# Altium PCB DOAN2.PcbDoc
Units mil, origin at the board's own origin, x right, y up, seen from the top; angles counter-clockwise.
Board outline 4270 x 4265 mil, 2 copper layers (Top Layer, Bottom Layer); 73 components, 65 nets, 251 pads, 0 vias.
Unrouted connection lines stored in the file: 12.
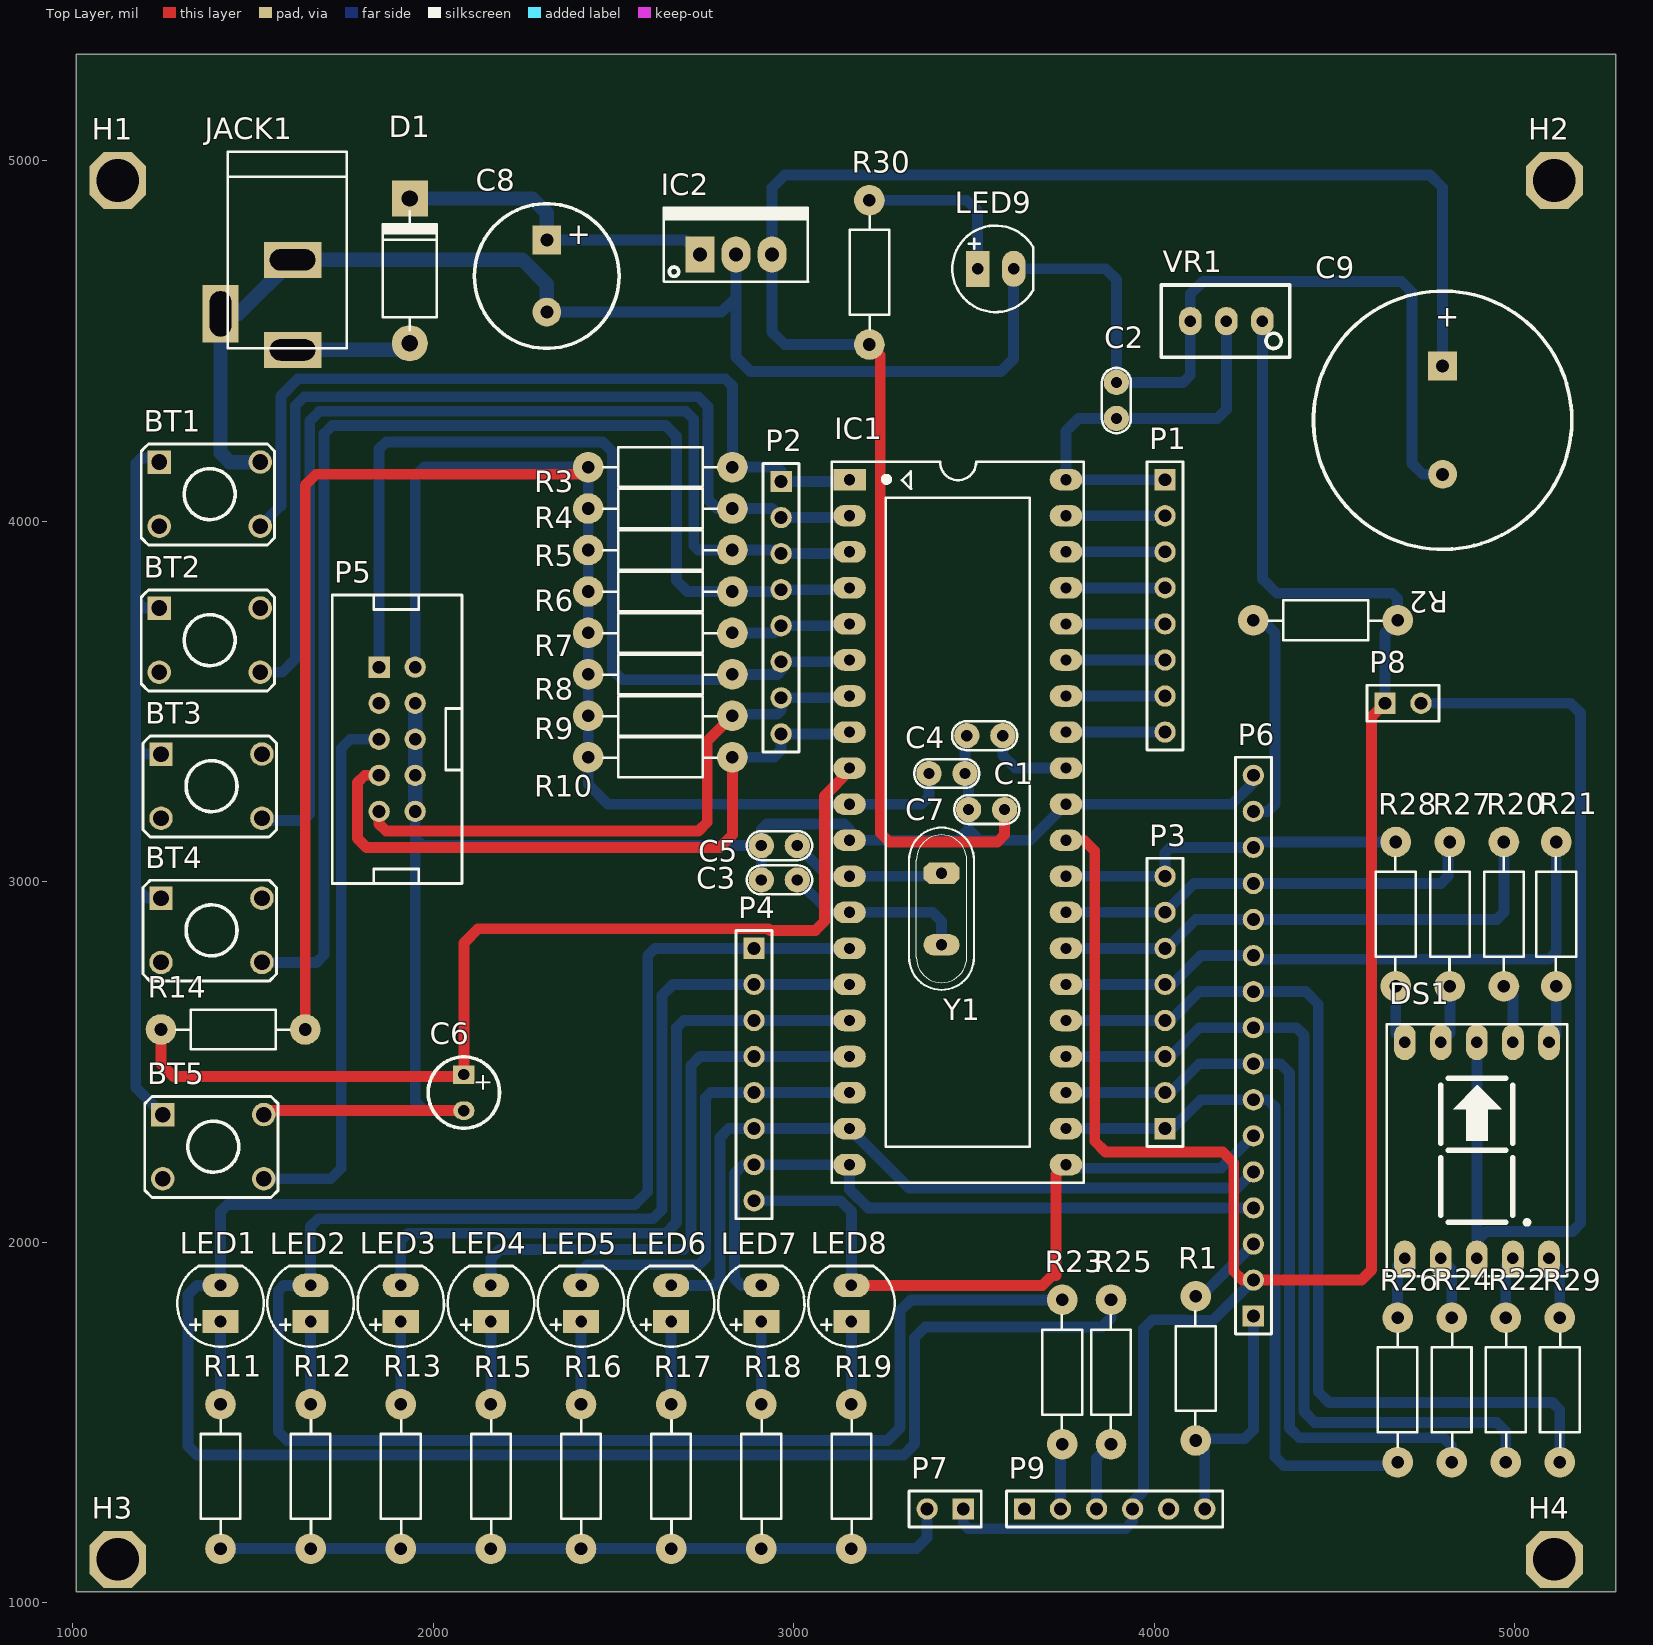
[diagram p0: Top Layer view]
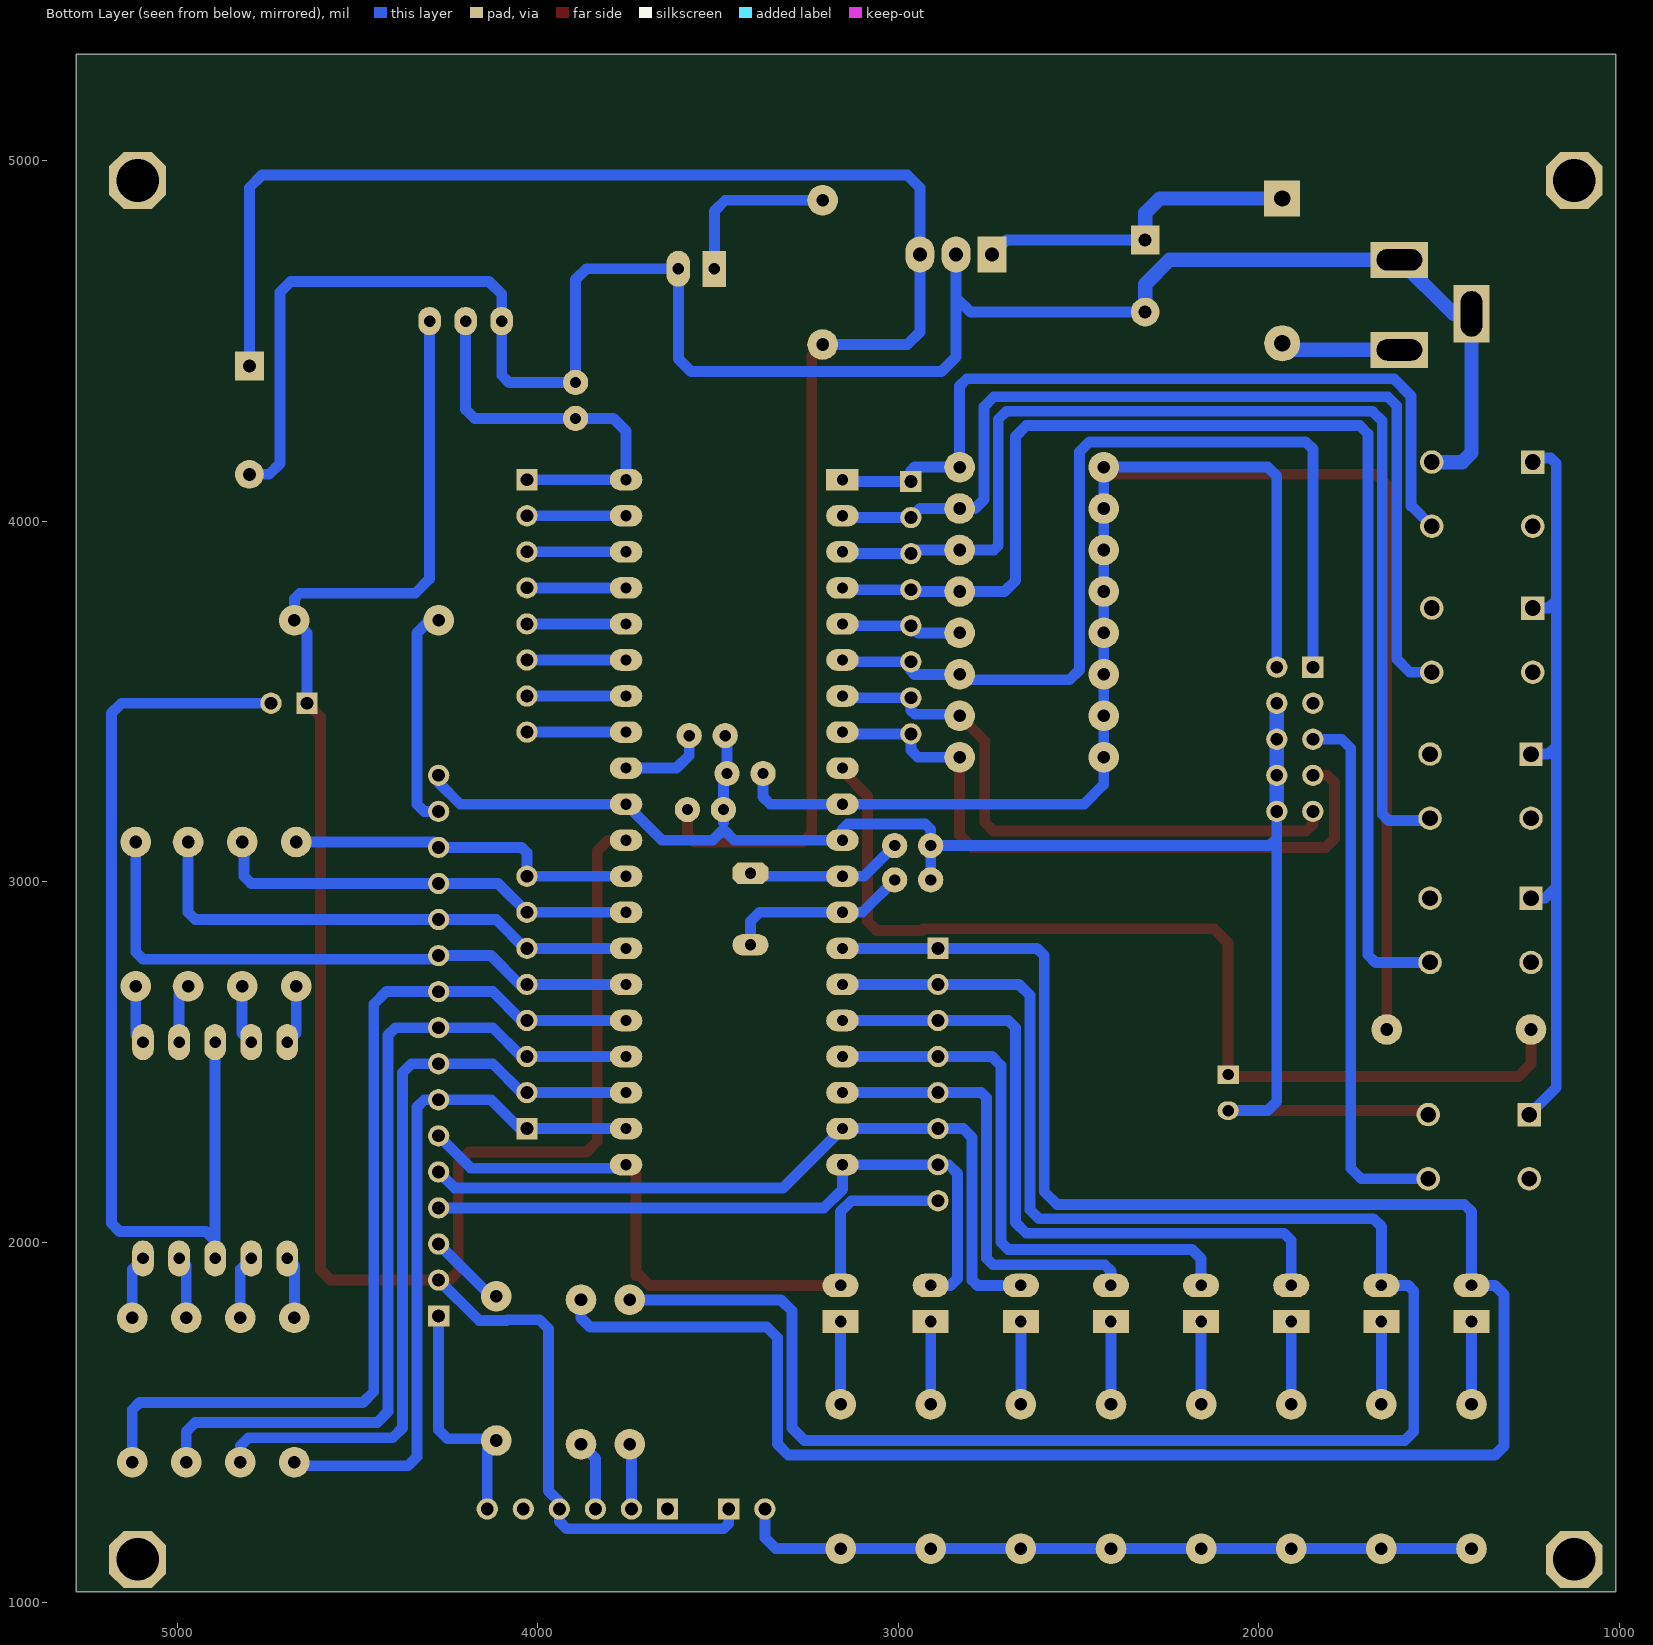
[diagram p1: Bottom Layer view, seen from below]
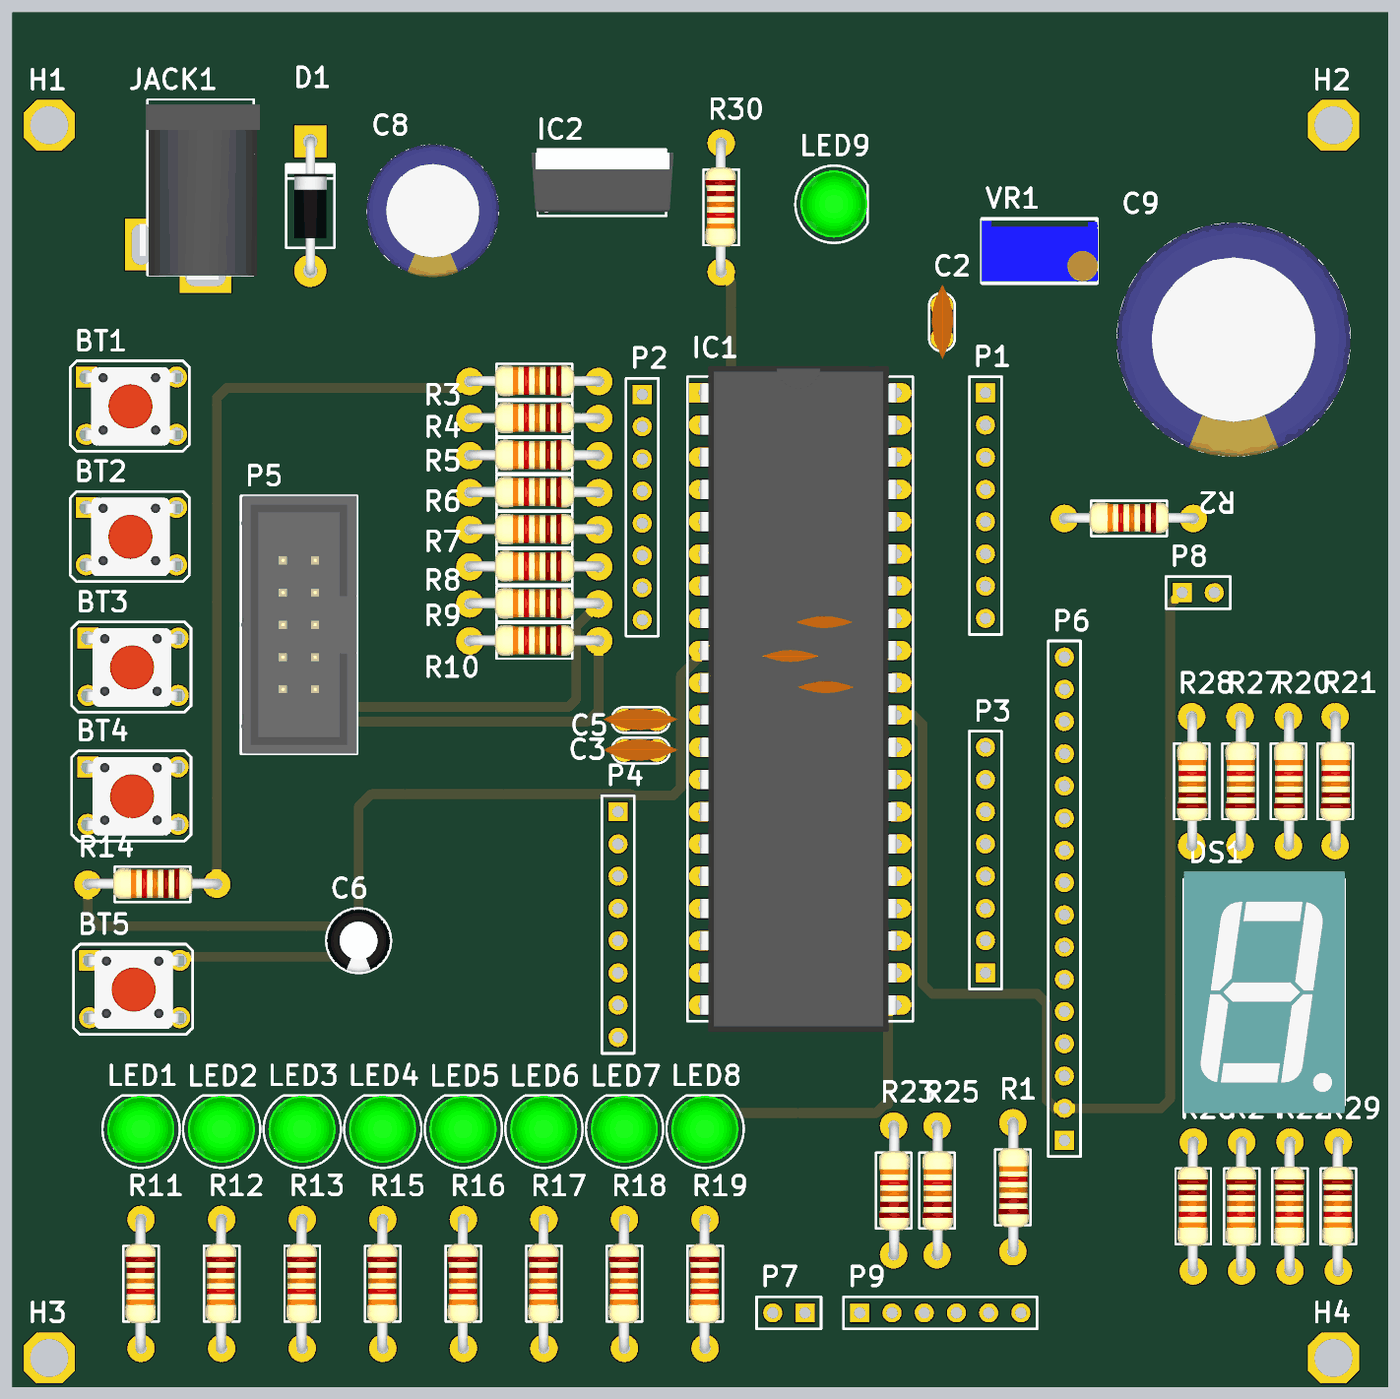
[diagram p2: 3D render of the assembled board from above, using the file's embedded part models]

## Layer stack, top to bottom
Top Solder: solder mask 0.4, Solder Resist, Dk 3.5
Top Layer: signal copper 1.4
Dielectric 1: dielectric 12.6, FR-4, Dk 4.8
Bottom Layer: signal copper 1.4
Bottom Solder: solder mask 0.4, Solder Resist, Dk 3.5

## Board outline
1010,1030 1010,5295 5280,5295 5280,1030

## Design rules (kind name [scope] priority, off if disabled: settings)
Clearance [All] p1: gap=10 ignorepadtopadclearanceinfootprint=FALSE except(0: Arc-Hole Track-Hole SMDPad-Hole THPad-Hole Via-Hole Fill-Hole Poly-Hole Region-Hole Text-Hole)
PolygonConnect [All] p1: connectstyle=Relief reliefconductorwidth=10 reliefentries=4 polygonreliefangle="90 Angle" airgapwidth=10
RoutingVias [All] p1: holewidth=28 width=50 viastyle="Through Hole" minholewidth=28 minwidth=50 maxholewidth=28 maxwidth=50
SolderMaskExpansion [All] p1: expansion=4 istentingtop=FALSE
Width [All] p1: maxlimit=40 minlimit=20 preferedwidth=30
30 further rules are at their usual default settings.

## Components (designator, comment, footprint, x,y, rotation, side; value= is the part's Value field where it differs from the comment)
BT1 "BUTTON" "BUTTON 4 PIN" 1380,4075 r0 top
BT2 "BUTTON" "BUTTON 4 PIN" 1380,3670 r0 top
BT3 "BUTTON" "BUTTON 4 PIN" 1385,3265 r0 top
BT4 "BUTTON" "BUTTON 4 PIN" 1385,2865 r0 top
BT5 "BUTTON" "BUTTON 4 PIN" 1390,2265 r0 top
C1 "Cap" "CAP 10x DIP" 3475,3300 r180 top value=100pF
C2 "Cap" "CAP 10x DIP" 3895,4385 r270 top value=100pF
C3 "Cap" "CAP 10x DIP" 2910,3005 r0 top value=100n
C4 "Cap" "CAP 10x DIP" 3580,3405 r180 top value=100n
C5 "Cap" "CAP 10x DIP" 2910,3100 r0 top value=100n
C6 "Cap Pol 5mm" C5mm 2085,2415 r270 top
C7 "Cap" "CAP 10x DIP" 3485,3200 r0 top value=100pF
C8 "Cap Pol 5mm" CAP_D10 2315,4780 r270 top
C9 "Cap Pol 5mm" CAP_D18 4800,4430 r270 top
D1 "DIODE" "DIODE DIP" 1935,4895 r270 top
DS1 "7SEG S" 7SEGS 4695,1955 r0 top value="LED 7S SEG"
H1 "HOLE" HOLE 1125,4945 r0 top
H2 "HOLE" HOLE 5110,4945 r0 top
H3 "HOLE" HOLE 1125,1120 r0 top
H4 "HOLE" HOLE 5110,1120 r0 top
IC1 "ATMEL 16A" DIP40/W0.6 3155,4115 r270 top value="Atmega 16L"
IC2 "LM7805" QTO-220 2740,4740 r0 top
JACK1 "JACK DC" "JACK DC" 1510,4600 r270 top value="Jac DC"
LED1 "" "LED-5 GRe" 1410,1780 r90 top value="LED 3 ly Single Colour"
LED2 "" "LED-5 GRe" 1660,1780 r90 top value="LED 3 ly Single Colour"
LED3 "" "LED-5 GRe" 1910,1780 r90 top value="LED 3 ly Single Colour"
LED4 "" "LED-5 GRe" 2160,1780 r90 top value="LED 3 ly Single Colour"
LED5 "" "LED-5 GRe" 2410,1780 r90 top value="LED 3 ly Single Colour"
LED6 "" "LED-5 GRe" 2660,1780 r90 top value="LED 3 ly Single Colour"
LED7 "" "LED-5 GRe" 2910,1780 r90 top value="LED 3 ly Single Colour"
LED8 "" "LED-5 GRe" 3160,1780 r90 top value="LED 3 ly Single Colour"
LED9 "LED" "LED-5 GRe" 3510,4700 r0 top value="LED 3 ly Single Colour"
P1 "PA" HDR1X8 4030,4115 r270 top
P2 "PB" HDR1X8 2965,4110 r270 top
P3 "PC" HDR1X8 4030,2315 r90 top
P4 "PD" HDR1X8 2890,2815 r270 top
P5 "Header 5X2" "IDC10 MALE" 1850,3595 r270 top
P6 "LCD16x2" HDR1X16 4275,1795 r90 top
P7 "Header 2H" HDR1X2 3470,1260 r180 top
P8 "Header 2H" HDR1X2 4640,3495 r0 top
P9 "UART-USB" HDR1X6 3640,1260 r0 top
R1 "1k" R1/2W 4115,1850 r270 top value="R1/4W - 1K"
R2 "1k" R1/2W 4275,3725 r0 top value="R1/4W - 1K"
R3 "1k" R1/2W 2430,4150 r0 top value="R1/4W - 1K"
R4 "1k" R1/2W 2430,4035 r0 top value="R1/4W - 1K"
R5 "1k" R1/2W 2430,3920 r0 top value="R1/4W - 1K"
R6 "1k" R1/2W 2430,3805 r0 top value="R1/4W - 1K"
R7 "1k" R1/2W 2430,3690 r0 top value="R1/4W - 1K"
R8 "1k" R1/2W 2430,3575 r0 top value="R1/4W - 1K"
R9 "1k" R1/2W 2430,3460 r0 top value="R1/4W - 1K"
R10 "1k" R1/2W 2430,3345 r0 top value="R1/4W - 1K"
R11 "1k" R1/2W 1410,1150 r90 top value="R1/4W - 1K"
R12 "1k" R1/2W 1660,1150 r90 top value="R1/4W - 1K"
R13 "1k" R1/2W 1910,1150 r90 top value="R1/4W - 1K"
R14 "1k" R1/2W 1245,2590 r0 top value="R1/4W - 1K"
R15 "1k" R1/2W 2160,1150 r90 top value="R1/4W - 1K"
R16 "1k" R1/2W 2410,1150 r90 top value="R1/4W - 1K"
R17 "1k" R1/2W 2660,1150 r90 top value="R1/4W - 1K"
R18 "1k" R1/2W 2910,1150 r90 top value="R1/4W - 1K"
R19 "1k" R1/2W 3160,1150 r90 top value="R1/4W - 1K"
R20 "1k" R1/2W 4970,3110 r270 top value="R1/4W - 1K"
R21 "1k" R1/2W 5115,3110 r270 top value="R1/4W - 1K"
R22 "1k" R1/2W 4975,1390 r90 top value="R1/4W - 1K"
R23 "1k" R1/2W 3745,1840 r270 top value="R1/4W - 1K"
R24 "1k" R1/2W 4825,1390 r90 top value="R1/4W - 1K"
R25 "1k" R1/2W 3880,1840 r270 top value="R1/4W - 1K"
R26 "1k" R1/2W 4675,1390 r90 top value="R1/4W - 1K"
R27 "1k" R1/2W 4820,3110 r270 top value="R1/4W - 1K"
R28 "1k" R1/2W 4670,3110 r270 top value="R1/4W - 1K"
R29 "1k" R1/2W 5125,1390 r90 top value="R1/4W - 1K"
R30 "1k" R1/2W 3210,4490 r90 top value="R1/4W - 1K"
VR1 "10K" RVAR 4200,4555 r180 top value="VR 10K"
Y1 "XTAL" "CRYSTAL DIP" 3410,2925 r270 top

## Footprints (in the part's own frame and the unit in brackets; to place one, negate y for a bottom-side part, rotate by r counter-clockwise, add the part's x,y. Pads: shape width x height; smd on the part's side, far side on the other; paste and mask are expansions set on the pad)
7SEGS [mil] "DIP 10 Leads; Body 12 x 15 mm; Pitch 0.5 mm"
  oval 60x100 hole 32: 1(0,0) 2(100,0) 3(200,0) 4(300,0) 5(400,0) 6(400,600) 7(300,600) 8(200,600) 9(100,600) 10(0,600)
  silkscreen extent -50,-50 450,650, body extent -50,-75 450,675, height 316
"BUTTON 4 PIN" [mil] "BUTTON SMORE 280mil x 178mil"
  rect 65x65 hole 43.31: 1(-140,89)
  round 65 hole 43.31: 1(140,89) 2(-140,-89) 2(140,-89)
  silkscreen extent -190,-141 180,139, body extent -159,-124 153,120, height 276
C5mm [mm]
  rect 1.3x1.5 hole 0.8: 1(-1.27,0)
  oval 1.3x1.5 hole 0.8: 2(1.27,0)
  silkscreen extent -2.51,-2.51 2.51,2.51, body extent -2.5,-2.5 2.49,2.5, height 11.01
"CAP 10x DIP" [mil]
  round 70 hole 31: 1(0,0) 2(100,0)
  silkscreen extent -40,-40 141,40, body extent -65,-32 165,35, height 265
CAP_D10 [mil]
  rect 80x80 hole 36: 1(0,0)
  round 80 hole 36: 2(200,0)
  silkscreen extent -101,-201 301,201, body extent -107,-207 307,207, height 551
CAP_D18 [mil]
  rect 80x80 hole 36: 1(0,0)
  round 80 hole 36: 2(300,0)
  silkscreen extent -208,-358 508,358, body extent -214,-364 514,364, height 1476
"CRYSTAL DIP" [mm]
  oct 1.524x2.54 hole 0.8: 1(-2.5,0)
  oval 1.524x2.54 hole 0.8: 2(2.54,0)
  silkscreen extent -5.71,-2.29 5.71,2.29, body extent -5.63,-2.35 5.72,2.3, height 3.5
"DIODE DIP" [mil] "Diode 2A, W 150mil, L 450mil"
  round 100 hole 45: 1(401.57,0)
  rect 100x100 hole 45: 2(0,0)
  silkscreen extent 36,-75 366,75, body extent -15,-50 415,51, height 100
DIP40/W0.6 [mil] "40 PIN, W 600mil, Pin to pin 100mil"
  rect 60x90 hole 31: 1(0,0)
  oval 60x90 hole 31: 2(100,0) 3(200,0) 4(300,0) 5(400,0) 6(500,0) 7(600,0) 8(700,0) 9(800,0) 10(900,0) 11(1000,0) 12(1100,0) 13(1200,0) 14(1300,0) 15(1400,0) 16(1500,0) 17(1600,0) 18(1700,0) 19(1800,0) 20(1900,0) 21(1900,600) 22(1800,600) 23(1700,600) 24(1600,600) 25(1500,600) 26(1400,600) 27(1300,600) 28(1200,600) 29(1100,600) 30(1000,600) 31(900,600) 32(800,600) 33(700,600) 34(600,600) 35(500,600) 36(400,600) 37(300,600) 38(200,600) 39(100,600) 40(0,600)
  silkscreen extent -50,-50 1950,650, body extent -82,-10 1982,600, height 224
HDR1X2 [mm] "Connector; Header; 2 Position"
  rect 1.5x1.5 hole 0.9: 1(0,0)
  round 1.5 hole 0.9: 2(2.54,0)
  silkscreen extent -1.27,-1.27 3.81,1.27
HDR1X6 [mm] "Connector; Header; 6 Position"
  rect 1.5x1.5 hole 0.9: 1(0,0)
  round 1.5 hole 0.9: 2(2.54,0) 3(5.08,0) 4(7.62,0) 5(10.16,0) 6(12.7,0)
  silkscreen extent -1.27,-1.27 13.97,1.27
HDR1X8 [mm] "Connector; Header; 8 Position"
  rect 1.5x1.5 hole 0.9: 1(0,0)
  round 1.5 hole 0.9: 2(2.54,0) 3(5.08,0) 4(7.62,0) 5(10.16,0) 6(12.7,0) 7(15.24,0) 8(17.78,0)
  silkscreen extent -1.27,-1.27 19.05,1.27
HDR1X16 [mm] "Connector; Header; 16 Position"
  rect 1.5x1.5 hole 0.9: 1(0,0)
  round 1.5 hole 0.9: 2(2.54,0) 3(5.08,0) 4(7.62,0) 5(10.16,0) 6(12.7,0) 7(15.24,0) 8(17.78,0) 9(20.32,0) 10(22.86,0) 11(25.4,0) 12(27.94,0) 13(30.48,0) 14(33.02,0) 15(35.56,0) 16(38.1,0)
  silkscreen extent -1.27,-1.27 39.37,1.27
HOLE [mm]
  oct 4x4 hole 3: H(0,0)
"IDC10 MALE" [mm] "Connector; Header; 5x2 Position"
  rect 1.5x1.5 hole 0.9: 1(0,0)
  round 1.5 hole 0.9: 2(0,2.54) 3(2.54,0) 4(2.54,2.54) 5(5.08,0) 6(5.08,2.54) 7(7.62,0) 8(7.62,2.54) 9(10.16,0) 10(10.16,2.54)
  silkscreen extent -5.08,-3.3 15.24,5.84, body extent -5.08,-3.28 15.24,5.82, height 9
"JACK DC" [mil] "Jac DC input"
  rect 100x160 hole 59.06 slot 125.98 at 90 deg: 1(125,100) 2(-125,100)
  rect 160x100 hole 59.06 slot 125.98 at 0 deg: 3(25,-100)
  silkscreen extent -425,-80 120,250, body extent -410,-105 134,269, height 434
"LED-5 GRe" [mil] "LED 2 PIN, 5 ly , Only colour,pin to pin 100mil"
  rect 65x100 hole 32: 1(0,0)
  oval 65x100 hole 32: 2(100,0)
  silkscreen extent -70,-120 154,120, body extent -54,-104 154,105, height 337
QTO-220 [mil] "TO-220 - 1-2-3"
  rect 80x100 hole 39: 1(0,0)
  oval 80x100 hole 39: 2(100,0) 3(200,0)
  silkscreen extent -100,-76 300,130, body extent -119,-64 322,121, height 755
R1/2W [mil] "R 1/2W, 2 pin, 300mil"
  round 85 hole 35: 1(0,0) 2(400,0)
  silkscreen extent 42,-55 356,55, body extent -12,-45 414,49, height 91
RVAR [mm] "Bien tro vi chinh"
  oval 1.6x2 hole 0.8: 1(-2.54,0) 2(0,0) 3(2.54,0)
  silkscreen extent -4.47,-2.54 4.6,2.54, body extent -4.54,-2.4 4.66,2.4, height 12.02

## Part data
C1 C2 C3 C4 C5 C7: "Capacitor", LatestRevisionDate=17-Jul-2002, LatestRevisionNote="Re-released for DXP Platform.", PackageDescription="Radial Cap, Thru-Hole; 2 Leads; 0.3 in Pin Spacing", PackageReference=RAD-0.3, Published=8-Jun-2000, Publisher="Altium Limited"
C6 C8 C9: "Polarized Capacitor (Axial)", LatestRevisionDate=17-Jul-2002, LatestRevisionNote="Re-released for DXP Platform.", PackageReference=POLAR0.8, Published=8-Jun-2000, Publisher="Altium Limited"
DS1: library part LED7S, "Single 7 Seg Dipslay"
IC1: library part ATmega16A-PU, "8-Bit AVR Microcontroller with 16K Bytes of In-System Programmable Flash Memory"
IC2: library part LM78xx, "On ap +, from + 5 to + 24VDC", =LM7808
LED1 LED2 LED3 LED4 LED5 LED6 LED7 LED8: library part LED, "LED Single colour Green and Red"
LED9: "LED Single colour Green and Red"
P1 P2 P3 P4: library part "Header 8", LatestRevisionDate=17-Jul-2002, LatestRevisionNote="Re-released for DXP Platform.", Publisher="Altium Limited"
P6: library part "LCD Text"
P9: library part "Header 6", LatestRevisionDate=17-Jul-2002, LatestRevisionNote="Re-released for DXP Platform.", Publisher="Altium Limited"
R1 R2 R3 R4 R5 R6 R7 R8 R9 R10 R11 R12 R13 R14 R15 R16 R17 R18 R19 R20 R21 R22 R23 R24 R25 R26 R27 R28 R29 R30: library part RESISTOR
VR1: library part "VAR RES"
Y1: "Crystal Oscillator", LatestRevisionDate=17-Jul-2002, LatestRevisionNote="Re-released for DXP Platform.", PackageDescription="Crystal, Thru-Hole; 2 Leads; Body 3.1 x 8.2 mm (Dia.xH)", PackageReference=R38, Published=8-Jun-2000, Publisher="Altium Limited"
P5 P7 P8: LatestRevisionDate=17-Jul-2002, LatestRevisionNote="Re-released for DXP Platform.", Publisher="Altium Limited"

## Nets (pads, with @x,y where several pads share a name; then routed paths per layer and width w, separated by ;. In a path a pad name is that pad's centre, name@x,y a point inside that pad or via, vN(x,y) a via of type N, cw(c..) or ccw(c..) an arc to the next point about the centre after c; other vN are vias at no path point)
a: DS1.7 R20.2 | length 165.4
  Bottom Layer w30: R20.2 4995,2685 DS1.7
AVR_RX: IC1.14 LED1.2 P4.1 R25.1 | length 6107
  Bottom Layer w30: IC1.14 P4.1 2615,2815 2595,2795 2595,2140 2560,2105 1430,2105 1410,2085 LED1.2 1345,1880 1320,1855 1320,1435 1345,1410 3305,1410 3335,1440 3335,1735 3365,1765 3855,1765 3880,1790 R25.1
AVR_TX: IC1.15 LED2.2 P4.2 R23.1 | length 5308.6
  Bottom Layer w30: IC1.15 P4.2 2665,2715 2635,2685 2635,2090 2610,2065 1681.57,2065 1660,2043.43 LED2.2 1585,1880 1570,1865 1570,1475 1595,1450 3260,1450 3295,1485 3295,1810 3325,1840 R23.1
b: DS1.6 R21.2 | length 163.3
  Bottom Layer w30: DS1.6 5115,2575 R21.2
c: DS1.4 R22.2 | length 173.3
  Bottom Layer w30: R22.2 4975,1935 DS1.4
d: DS1.2 R24.2 | length 177.4
  Bottom Layer w30: DS1.2 4825,1925 R24.2
e: DS1.1 R26.2 | length 173.3
  Bottom Layer w30: R26.2 4675,1935 DS1.1
f: DS1.9 R27.2 | length 165.4
  Bottom Layer w30: DS1.9 4820,2580 R27.2
FT_RX: P9.2 R23.2 | length 182.1
  Bottom Layer w30: P9.2 3740,1435 R23.2
FT_TX: P9.3 R25.2 | length 196.6
  Bottom Layer w30: P9.3 3840,1400 R25.2
g: DS1.10 R28.2 | length 165.4
  Bottom Layer w30: R28.2 4670,2580 DS1.10
GND: BT1.1 BT2.1 BT3.1 BT4.1 BT5.1 C1.1 C2.1 C3.1 C4.2 C5.1 C6.2 C7.1 C8.2 C9.2 IC1.11 IC1.31 IC2.2 JACK1.2 JACK1.3 LED9.2 P5.4 P5.6 P5.8 P5.10 P6.1 P6.16 P9.6 R1.2 VR1.3 | length 13209.9
  Top Layer w30: BT5.1@1530,2354 1541,2365 C6.2
  Bottom Layer w30: BT2.1@1240,3759 1196,3759 1175,3780 ; BT1.1@1240,4164 1229,4175 1190,4175 1175,4160 1175,3780 ; BT4.1@1245,2954 1206,2954 1175,2985 ; BT3.1@1245,3354 1196,3354 1175,3375 ; BT5.1@1250,2354 1175,2429 1175,2985 ; P5.10 1950,3120 ; C6.2 1975,2365 1950,2390 1950,3120 ; C8.2 2800,4580 2840,4620 ; IC2.2 2840,4620 ; C3.1 C5.1 ; C4.2 3475,3400 C1.1 3485,3290 C7.1 3485,3165 ; P9.6 4140,1425 R1.2 4120,1455 4250,1455 4275,1480 P6.1 ; P6.16 4275,3275 4215,3215 IC1.31 3655,3115 3515,3115 3485,3145 3455,3115 IC1.11 3155,3145 3140,3160 2925,3160 2910,3145 C5.1 ; C9.2 4745,4130 4715,4160 4715,4635 4685,4665 4135,4665 4100,4630 VR1.3 4100,4405 4080,4385 C2.1 3895,4670 3865,4700 LED9.2 3610,4450 3575,4415 2880,4415 2840,4455 2840,4620 ; 1175,2985 1175,3375 ; 1175,3375 1175,3780 ; 1950,3120 1970,3100 C5.1
  Bottom Layer w40: BT1.1@1520,4164 1436,4164 1410,4190 JACK1.3 1460,4575 JACK1.2 2247.57,4725 2315,4657.57 C8.2 ; P5.10 P5.8 P5.6 P5.4
h: DS1.5 R29.2 | length 177.4
  Bottom Layer w30: DS1.5 5125,1925 R29.2
MISO: IC1.7 P2.7 P5.9 R9.2 | length 1658.2
  Top Layer w30: P5.9 1850,3160 1869.53,3140.47 2735.47,3140.47 2760,3165 2760,3390 R9.2
  Bottom Layer w30: R9.2 2830,3464.53 2954.53,3464.53 2965,3475 P2.7 3150,3510 IC1.7
MOSI: IC1.6 P2.6 P5.1 R8.2 | length 2583.5
  Bottom Layer w30: P5.1 1850,4200 1870,4220 2470,4220 2497.5,4192.5 2497.5,3587.5 2525,3560 2815,3560 R8.2 2955,3575 2965,3585 P2.6 3150,3610 IC1.6
NetC4_1: C4.1 IC1.32 | length 244.5
  Bottom Layer w30: C4.1 3580,3350 3615,3315 IC1.32
NetC6_1: C6.1 IC1.9 R14.1 | length 2799.2
  Top Layer w30: R14.1 1245,2495 1280,2460 2080,2460 C6.1 2085,2830 2124.53,2869.53 2929.88,2869.53 2934.41,2865 3060,2865 3085,2890 3085,3237.78 3155,3307.78 IC1.9
NetC7_2: C7.2 C9.1 IC2.3 R30.1 | length 4869.6
  Top Layer w30: R30.1 3240,4460 3240,3135 3265,3110 3565,3110 3585,3130 C7.2
  Bottom Layer w30: R30.1 2975,4490 2940,4525 IC2.3 2940,4925 2975,4960 4765,4960 4800,4925 C9.1
NetC8_1: C8.1 D1.2 IC2.1 | length 913.1
  Bottom Layer w30: C8.1 2700,4780 IC2.1
  Bottom Layer w40: D1.2 2275,4895 2315,4855 C8.1
NetD1_1: D1.1 JACK1.1 | length 332.6
  Bottom Layer w40: JACK1.1 1916.57,4475 D1.1
NetDS1_3: DS1.3 DS1.8 P8.2 | length 2776.1
  Bottom Layer w30: P8.2 5155,3495 5182.5,3467.5 5182.5,2052.5 5160,2030 4920,2030 4895,2005 ; DS1.3 4895,2005 ; DS1.8 4895,2005
NetLED1_1: LED1.1 R11.2 | length 230
  Bottom Layer w30: R11.2 LED1.1
NetLED2_1: LED2.1 R12.2 | length 230
  Bottom Layer w30: R12.2 LED2.1
NetLED3_1: LED3.1 R13.2 | length 230
  Bottom Layer w30: R13.2 LED3.1
NetLED4_1: LED4.1 R15.2 | length 230
  Bottom Layer w30: R15.2 LED4.1
NetLED5_1: LED5.1 R16.2 | length 230
  Bottom Layer w30: R16.2 LED5.1
NetLED6_1: LED6.1 R17.2 | length 230
  Bottom Layer w30: R17.2 LED6.1
NetLED7_1: LED7.1 R18.2 | length 230
  Bottom Layer w30: R18.2 LED7.1
NetLED8_1: LED8.1 R19.2 | length 230
  Bottom Layer w30: R19.2 LED8.1
NetLED9_1: LED9.1 R30.2 | length 472.4
  Bottom Layer w30: R30.2 3480,4890 3510,4860 LED9.1
NetP6_3: P6.3 R1.1 | length 220.1
  Bottom Layer w30: R1.1 4130,1850 P6.3
NetP6_15: P6.15 R2.1 | length 617.8
  Bottom Layer w30: P6.15 4315,3195 4335,3215 4335,3690 4300,3725 R2.1
NetP7_2: P7.2 R11.1 R12.1 R13.1 R15.1 R16.1 R17.1 R18.1 R19.1 | length 2052.4
  Bottom Layer w30: R11.1 R12.1 R13.1 R15.1 R16.1 R17.1 R18.1 R19.1 3340,1150 3370,1180 P7.2
PA0: C2.2 IC1.40 P1.1 VR1.2 | length 1124.9
  Bottom Layer w30: P1.1 IC1.40 3755,4250 3790,4285 C2.2 4175,4285 4200,4310 VR1.2
PA1: IC1.39 P1.2 | length 275
  Bottom Layer w30: IC1.39 P1.2
PA2: IC1.38 P1.3 | length 275
  Bottom Layer w30: IC1.38 P1.3
PA3: IC1.37 P1.4 | length 275
  Bottom Layer w30: IC1.37 P1.4
PA4: IC1.36 P1.5 | length 275
  Bottom Layer w30: IC1.36 P1.5
PA5: IC1.35 P1.6 | length 275
  Bottom Layer w30: IC1.35 P1.6
PA6: IC1.34 P1.7 | length 275
  Bottom Layer w30: IC1.34 P1.7
PA7: IC1.33 P1.8 | length 275
  Bottom Layer w30: IC1.33 P1.8
PB0: BT1.2 IC1.1 P2.1 R3.2 | length 2252.6
  Bottom Layer w30: BT1.2@1520,3986 1576.5,4042.5 1577.5,4042.5 1577.5,4347.5 1625,4395 2810,4395 2830,4375 R3.2 2955,4150 2965,4140 P2.1 3150,4110 IC1.1
PB1: BT2.2 IC1.2 P2.2 R4.2 | length 2654.6
  Bottom Layer w30: BT2.2@1520,3581 1581,3581 1617.5,3617.5 1617.5,4320 1642.5,4345 2735,4345 2762.5,4317.5 2762.5,4060 2787.5,4035 R4.2 2940,4035 P2.2 3150,4010 IC1.2
PB2: BT3.2 IC1.3 P2.3 R5.2 | length 3111.8
  Bottom Layer w30: BT3.2@1525,3176 1531,3170 1640,3170 1657.5,3187.5 1657.5,4277.5 1685,4305 2700,4305 2722.5,4282.5 2722.5,3932.5 2735,3920 R5.2 2955,3920 P2.3 3150,3910 IC1.3
PB3: BT4.2 IC1.4 P2.4 R6.2 | length 3522.2
  Bottom Layer w30: BT4.2@1525,2776 1676,2776 1697.5,2797.5 1697.5,4242.5 1720,4265 2645,4265 2675,4235 2675,3835 2705,3805 R6.2 2960,3805 P2.4 3150,3810 IC1.4
PB4: IC1.5 P2.5 R7.2 | length 335.4
  Bottom Layer w30: R7.2 2945,3690 P2.5 3150,3710 IC1.5
PC0: IC1.22 P3.1 P6.7 R26.1 | length 1945.9
  Bottom Layer w30: IC1.22 P3.1 4050,2315 4130,2395 P6.7 4315,2395 4335,2375 4335,1405 4360,1380 4665,1380 R26.1
PC1: IC1.23 P3.2 P6.8 R24.1 | length 2164.2
  Bottom Layer w30: IC1.23 P3.2 4045,2415 4125,2495 P6.8 4350,2495 4375,2470 4375,1485 4402.5,1457.5 4802.5,1457.5 4825,1435 R24.1
PC2: IC1.24 P3.3 P6.9 R22.1 | length 2414.2
  Bottom Layer w30: IC1.24 P3.3 4045,2515 4125,2595 P6.9 4395,2595 4415,2575 4415,1530 4445,1500 4950,1500 4975,1475 R22.1
PC3: IC1.25 P3.4 P6.10 R29.1 | length 2658.3
  Bottom Layer w30: IC1.25 P3.4 4045,2615 4125,2695 P6.10 4420,2695 4455,2660 4455,1585 4485,1555 5105,1555 5125,1535 R29.1
PC4: IC1.26 P3.5 P6.11 R21.1 | length 1710.6
  Bottom Layer w30: IC1.26 P3.5 4050,2715 4130,2795 P6.11 4285,2785 5095,2785 5115,2805 R21.1
PC5: IC1.27 P3.6 P6.12 R20.1 | length 1451.4
  Bottom Layer w30: IC1.27 P3.6 4035,2815 4115,2895 P6.12 4950,2895 4970,2915 R20.1
PC6: IC1.28 P3.7 P6.13 R27.1 | length 1198.5
  Bottom Layer w30: IC1.28 P3.7 4110,2995 P6.13 4795,2995 4815,3015 4815,3105 R27.1
PC7: IC1.29 P3.8 P6.14 R28.1 | length 992.4
  Bottom Layer w30: IC1.29 P3.8 4030,3080 4045,3095 P6.14 4290,3110 R28.1
PD2: IC1.16 LED3.2 P4.3 | length 1939
  Bottom Layer w30: LED3.2 1910,2005 1930,2025 2645,2025 2675,2055 2675,2595 2695,2615 P4.3 IC1.16
PD3: IC1.17 LED4.2 P4.4 | length 1589
  Bottom Layer w30: LED4.2 2160,1955 2185,1980 2695,1980 2715.47,2000.47 2715.47,2490.47 2740,2515 P4.4 IC1.17
PD4: IC1.18 LED5.2 P4.5 | length 1250.7
  Bottom Layer w30: LED5.2 2410,1920 2427.5,1937.5 2737.5,1937.5 2755.47,1955.47 2755.47,2400.47 2770,2415 P4.5 IC1.18
PD5: IC1.19 LED6.2 P4.6 P6.5 | length 2114.5
  Bottom Layer w30: LED6.2 2780,1880 2795,1895 2795.47,1894.53 2795.47,2290.47 2820,2315 P4.6 IC1.19 3320,2150 4230,2150 P6.5
PD6: IC1.20 LED7.2 P4.7 P6.4 | length 1913
  Bottom Layer w30: LED7.2 2855,1880 2835.47,1899.53 2835.47,2190.47 2860,2215 P4.7 IC1.20 3155,2146.57 3206.57,2095 P6.4
PD7: IC1.21 LED8.2 P4.8 P6.6 | length 1946.6
  Top Layer w30: LED8.2 3689.54,1880 3717.04,1907.5 3727.5,1907.5 3727.5,2187.5 IC1.21
  Bottom Layer w30: P4.8 3130,2115 3160,2085 LED8.2 ; IC1.21 3765,2205 4185,2205 P6.6
RESET: BT5.2 P5.5 | length 1507.4
  Bottom Layer w30: BT5.2@1530,2176 1716,2176 1745,2205 1745,3370 1770,3395 P5.5
SCK: IC1.8 P2.8 P5.7 R10.2 | length 1883.5
  Top Layer w30: P5.7 1810,3295 1790,3275 1790,3120 1815,3095 2795,3095 2830,3130 R10.2
  Bottom Layer w30: R10.2 2945,3345 2965,3365 P2.8 3150,3410 IC1.8
VCC: C1.2 IC1.10 IC1.30 P5.2 P6.2 P7.1 P8.1 P9.4 R2.2 R3.1 R4.1 R5.1 R6.1 R7.1 R8.1 R9.1 R10.1 R14.2 VR1.1 | length 11708.9
  Top Layer w30: R14.2 1645,4100 1675,4130 2410,4130 R3.1 ; IC1.30 3805,3115 3835,3085 3835,2280 3865,2250 4190,2250 4220.47,2219.53 4220.47,1919.53 4245,1895 P6.2 4575,1895 4602.5,1922.5 4602.5,3457.5 P8.1
  Bottom Layer w30: P5.2 1950,4125 1975,4150 R3.1 R4.1 R5.1 R6.1 R7.1 R8.1 R9.1 R10.1 2430,3270 2485,3215 IC1.10 3355,3215 3375,3235 C1.2 ; P7.1 3470,1220 3485,1205 3920,1205 3940,1225 P9.4 3940,1280 3970,1310 3970,1760 3995,1785 4084.54,1785 4087.04,1782.5 4162.5,1782.5 P6.2 ; VR1.1 4300,3840 4340,3800 4660,3800 4675,3785 R2.2 4640,3690 P8.1
XTAL1: C3.2 IC1.13 Y1.2 | length 512.6
  Bottom Layer w30: C3.2 3100,2915 IC1.13 3385,2915 3410,2890 Y1.2
XTAL2: C5.2 IC1.12 Y1.1 | length 438.7
  Bottom Layer w30: C5.2 3095,3015 IC1.12 3401.57,3015 Y1.1
pads on no net: H1.H H2.H H3.H H4.H P5.3 P9.1 P9.5

## Silkscreen, mask and mechanical layers (free items; w line width, h text height)
Bottom Solder:
  lines w10: 1010,1030 1010,1125 1010,5295 5280,5295 5280,5090 5280,4795 5280,1030 1010,1030
  text "DO AN II" at 2320,5115 h100

## Text inside footprints (layer, text, board x,y; h text height)
C6: Top Overlay "+" at 2118,2470 h47.24 r270
C8: Top Overlay "+" at 2370,4749 h100
C9: Top Overlay "+" at 4780,4520 h100